# Altium PCB 功耗测试工装.PcbDoc (part 2 of 2)
Units mm, origin at the board's own origin, x right, y up, seen from the top; angles counter-clockwise.
Board outline 154.34 x 149.4 mm, 2 copper layers (Component Side, Bottom Layer), stack 0.325 mm thick; 158 components, 88 nets, 495 pads, 374 vias.
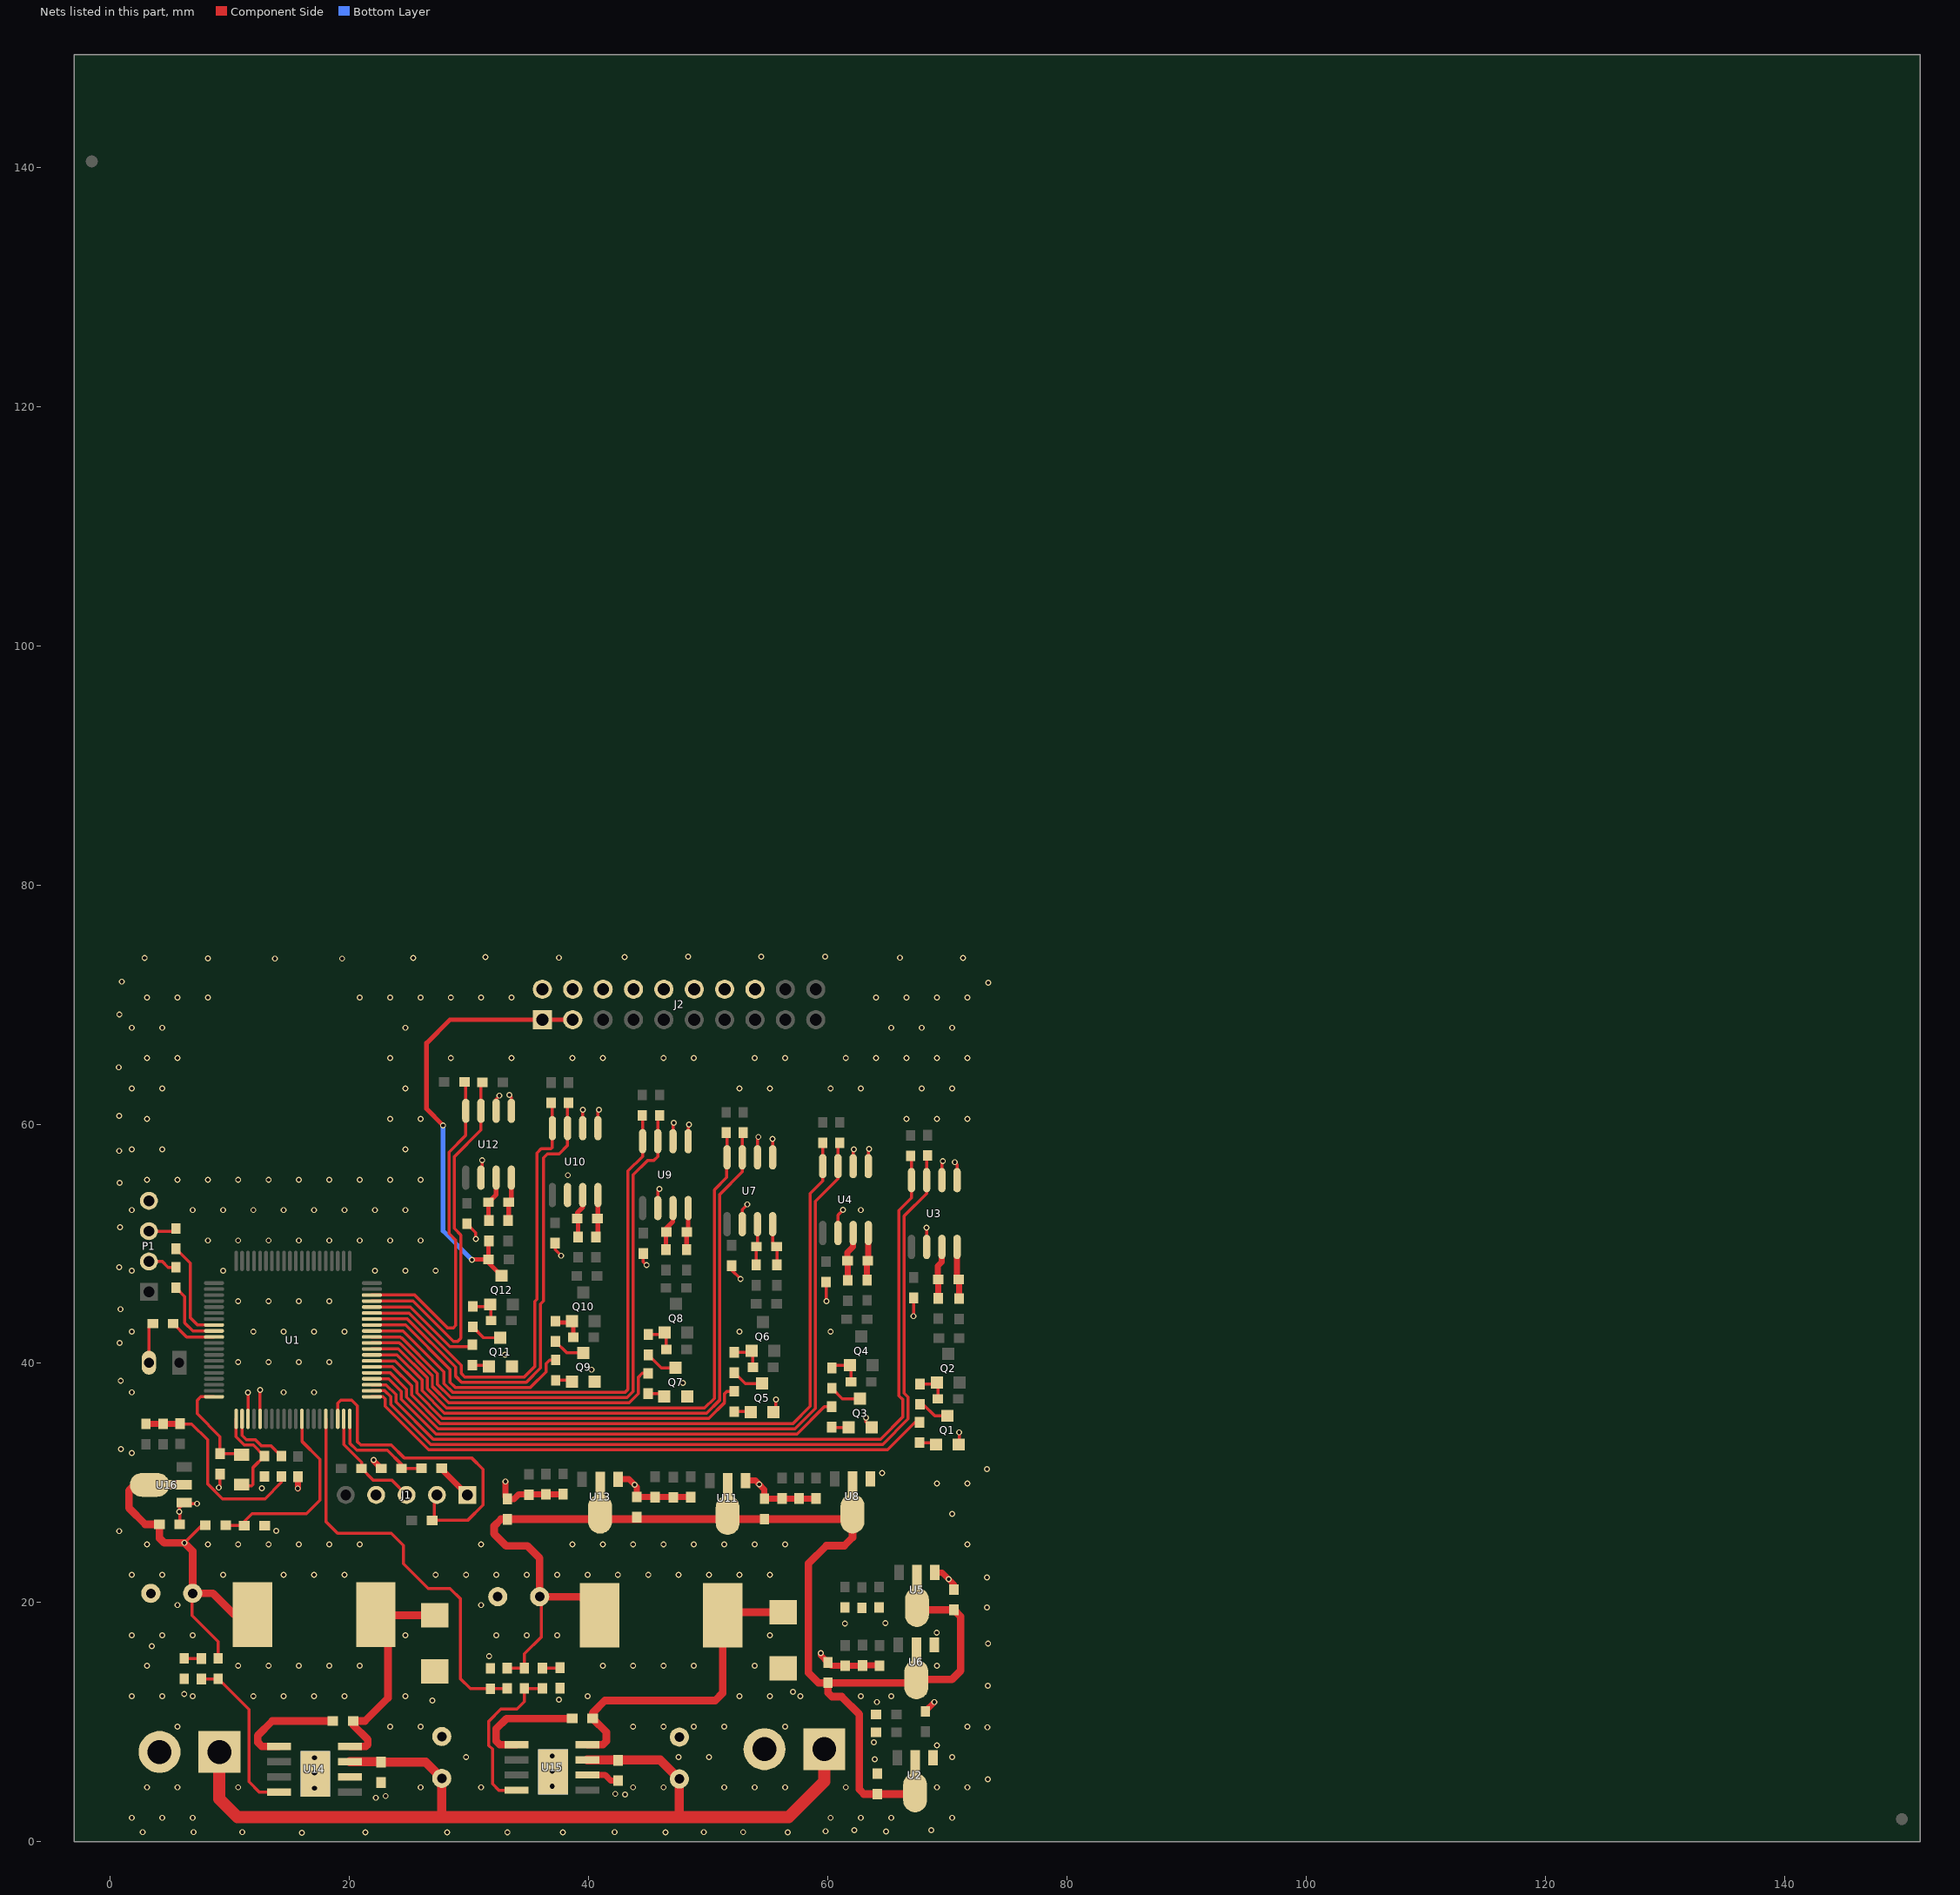
[diagram p2: the nets of this part, all layers, seen from the top]

## Via types
v1: diameter 0.5, hole 0.3, Component Side to Bottom Layer, tented both sides, 368 vias
v2: diameter 0.813, hole 0.406, Component Side to Bottom Layer, 6 vias

## Nets (pads, with @x,y where several pads share a name; then routed paths per layer and width w, separated by ;. In a path a pad name is that pad's centre, name@x,y a point inside that pad or via, vN(x,y) a via of type N, cw(c..) or ccw(c..) an arc to the next point about the centre after c; other vN are vias at no path point) (continued)
3_6V_6_OUT: J2.1 J2.3 Q12.3 R51.1 R52.2 | length 37.5
  Component Side w0.381: v1(27.838,59.893) 26.467,61.265 26.467,66.777 28.423,68.732 J2.1@36.144,68.732 J2.3@38.684,68.732 ; v1(30.251,48.666) 30.277,48.692 R52.2@31.648,48.692 ; R51.1@31.674,50.241 31.648,50.216 R52.2@31.648,48.692 ; Q12.3@32.741,47.326 31.648,48.419 R52.2@31.648,48.692
  Bottom Layer w0.381: v1(27.838,59.893) 27.838,51.079 v1(30.251,48.666)
3_6V_dianliu_CHK_1: R10.2 U1.1 | length 48.9
  Component Side w0.254: U1.1@21.891,37.211 22.835,37.211 23.012,37.033 23.012,36.423 26.644,32.791 64.999,32.791 67.285,35.077 R10.2@67.691,35.077
3_6V_dianliu_CHK_2: R18.2 U1.4 | length 41.7
  Component Side w0.254: U1.4@21.891,38.711 23.291,38.711 24.359,37.643 24.359,36.997 27.269,34.087 57.432,34.087 59.718,36.373 R18.2@60.325,36.373
3_6V_dianliu_CHK_3: R26.2 U1.7 | length 34.2
  Component Side w0.254: U1.7@21.891,40.211 23.84,40.211 25.654,38.397 25.654,37.534 27.78,35.408 50.066,35.408 51.384,36.726 51.384,37.465 51.587,37.668 R26.2@52.197,37.668
3_6V_dianliu_CHK_4: R34.2 U1.10 | length 27.5
  Component Side w0.254: U1.10@21.891,41.711 24.176,41.711 24.228,41.658 24.267,41.658 26.949,38.976 26.949,38.07 28.317,36.703 43.411,36.703 44.171,37.463 44.171,38.837 44.501,39.167 R34.2@44.983,39.167
3_6V_dianliu_CHK_5: R42.2 U1.13 | length 19.5
  Component Side w0.254: U1.13@21.891,43.211 24.709,43.211 28.426,39.494 28.426,38.426 28.853,37.998 35.154,37.998 36.449,39.294 36.449,39.98 36.754,40.284 R42.2@37.262,40.284
3_6V_dianliu_CHK_6: R50.2 U1.16 | length 9.8
  Component Side w0.254: U1.16@21.891,44.711 25.115,44.711 28.423,41.403 30.15,41.403 R50.2@30.302,41.554
5V: C8.1 C14.1 C20.1 C26.1 C32.1 C38.1 C49.1 L2.2 R56.2 R62.2 U2.2 U5.2 U6.2 U8.2 U11.2 U13.2 | length 105.7
  Component Side w0.254: R56.2@33.198,14.529 R62.2@34.646,14.529 34.646,15.723 36.043,17.12 36.043,20.371 C49.1@35.916,20.498
  Component Side w0.635: L2.2@40.926,18.948 39.376,20.498 C49.1@35.916,20.498 35.916,23.724 34.9,24.74 33.122,24.74 32.106,25.756 32.106,26.391 32.69,26.975 61.614,26.975 U8.2@62.078,27.439 62.078,25.451 61.392,24.765 59.893,24.765 58.395,23.266 58.395,14.148 59.245,13.297 C20.1@60.02,13.297 ; U2.2@67.31,4.121 67.189,4.001 C8.1@64.16,4.001 63.03,4.001 62.636,4.394 62.636,10.668 61.163,12.141 60.35,12.141 60.02,12.471 C20.1@60.02,13.297 ; U5.2@67.462,19.615 67.685,19.393 C14.1@70.561,19.393 71.12,18.834 71.12,14.3 70.39,13.57 U6.2@67.412,13.57 67.139,13.297 C20.1@60.02,13.297
ADC_5V: R56.1 R64.2 U1.76 | length 34.4
  Component Side w0.254: U1.76@18.041,35.361 18.041,26.79 19.025,25.806 23.52,25.806 24.536,24.79 24.536,23.241 26.594,21.184 28.423,21.184 29.312,20.295 29.312,13.614 30.124,12.802 R64.2@31.801,12.802 31.826,12.827 R56.1@33.198,12.827
ADC_MCU_5V: R55.1 R63.2 U1.72 | length 16.4
  Component Side w0.254: R55.1@9.677,26.467 11.201,26.467 R63.2@11.227,26.441 11.227,26.772 11.887,27.432 16.434,27.432 17.551,28.55 17.551,31.981 16.041,33.492 U1.72@16.041,35.361
GND: C1.2 C2.1 C3.2 C4.2 C5.1 C6.1 C7.2 C8.2 C9.2 C10.2 C12.1 C13.2 C14.2 C15.2 C16.2 C18.1 C19.2 C20.2 C21.2 C22.2 C24.1 C25.2 C26.2 C27.2 C28.2 C30.1 C31.2 C32.2 C33.2 C34.2 C36.1 C37.2 C38.2 C39.2 C40.2 C44.2 C45.2 C46.2 C47.2 C48.2 C49.2 C50.2 C51.2 C52.2 C53.2 D2.1 D3.1 J1.4 J2.2 J2.4 J2.6 J2.8 J2.10 J2.12 J2.14 J2.16 JP1.2 JP2.2 P1.4 Q1.2 Q3.2 Q5.2 Q7.2 Q9.2 Q11.2 R57.1 R60.1 R63.1 R64.1 U1.63 U1.65 U2.1 U3.1 U3.2 U3.6 U4.1 U4.2 U4.6 U5.1 U6.1 U7.1 U7.2 U7.6 U8.1 U9.1 U9.2 U9.6 U10.1 U10.2 U10.6 U11.1 U12.1 U12.2 U12.6 U13.1 U14.6 U14.9 U15.6 U15.9 U16.1 | length 98.9
  Component Side w0.254: C51.2@5.83,26.543 5.83,27.571 v1(5.791,27.61) 5.791,27.928 U16.1@6.209,28.345 6.283,28.27 v1(7.264,28.27) ; C50.2@5.842,34.938 6.82,34.938 8.153,33.604 8.153,29.924 9.401,28.677 12.954,28.677 14.326,30.048 C1.2@14.326,30.543 ; v1(9.093,29.616) 9.195,29.718 C5.1@9.195,30.747 ; U1.63@11.541,35.361 v1(11.541,37.557) ; U1.65@12.541,35.361 v1(12.541,37.788) v1@12.548,37.795 ; C36.1@29.845,51.677 30.582,50.94 v1(30.582,50.394) ; U12.6@31.013,55.524 31.115,55.626 v1(31.115,56.972) ; U12.2@32.283,61.112 32.283,62.103 v1(32.563,62.382) ; v1(33.376,62.433) 33.553,62.255 U12.1@33.553,61.112 ; C30.1@37.211,50.051 37.211,49.505 v1(37.719,48.997) ; U10.2@39.522,59.665 v1(39.522,61.189) ; U10.1@40.792,59.665 40.792,61.112 v1(40.869,61.189) ; C24.1@44.577,49.187 44.577,48.489 v1(44.856,48.209) ; U9.6@45.796,52.984 45.796,54.458 v1(45.923,54.585) ; U9.2@47.066,58.572 47.066,60.02 v1(47.142,60.096) ; U9.1@48.336,58.572 48.336,59.893 v1(48.412,59.969) ; C18.1@51.968,48.171 51.968,47.803 v1(52.712,47.059) ; U7.6@52.857,51.638 52.857,52.858 v1(53.29,53.291) ; U7.2@54.127,57.226 54.127,58.852 v1(54.204,58.928) ; U7.1@55.397,57.226 v1(55.397,58.776) ; Q5.2@55.458,35.909 55.677,36.128 v1(55.677,36.982) ; C12.1@59.868,46.8 59.868,45.237 v1(59.893,45.212) ; U4.6@60.858,50.902 60.858,52.4 v1(61.29,52.832) ; U4.2@62.128,56.49 62.128,57.836 v1(62.179,57.887) ; v1(63.195,35.458) 63.195,35.107 Q3.2@63.663,34.639 ; U4.1@63.398,56.49 63.398,57.861 v1(63.475,57.937) ; v1(67.183,43.942) C6.1@67.183,45.479 ; v1(68.25,51.359) 68.275,51.333 U3.6@68.275,49.733 ; U3.2@69.545,55.321 69.545,56.82 v1(69.621,56.896) ; v1(70.612,56.82) 70.815,56.617 U3.1@70.815,55.321 ; Q1.2@70.952,33.217 70.993,33.258 v1(70.993,34.239)
  Component Side w0.508: C53.2@2.997,34.938 C52.2@4.445,34.938 C50.2@5.842,34.938 ; v1(15.697,29.54) 15.723,29.566 C2.1@15.723,30.518 ; v1(22.047,31.928) 22.047,31.839 C3.2@22.669,31.217 ; v1(33.045,30.124) 33.045,28.842 C38.2@33.223,28.664 33.77,28.664 34.175,29.07 C40.2@37.871,29.07 ; U15.6@39.925,5.588 41.402,5.588 41.872,5.118 C47.2@42.469,5.118 ; U13.1@42.47,30.313 43.398,30.313 v1(43.866,29.845) 44.044,29.667 C32.2@44.044,28.842 48.514,28.842 C34.2@48.539,28.816 ; U11.1@53.138,30.212 53.964,30.212 v1(54.28,29.896) 54.712,29.464 C26.2@54.712,28.69 59.005,28.69 C25.2@59.03,28.714 ; v1(59.436,15.773) 59.436,15.583 C20.2@60.02,14.999 60.3,14.719 C19.2@61.468,14.719 62.89,14.719 C21.2@62.916,14.744 64.364,14.744 C22.2@64.338,14.719 ; C10.2@68.174,10.91 68.174,10.947 v1(68.91,11.684) ; U5.1@68.962,22.515 69.585,22.515 v1(70.129,21.971) 70.561,21.539 C14.2@70.561,21.095
  other v1: 16.027,0.762 21.336,0.787 28.194,0.787 33.223,0.787 37.846,0.787 46.431,0.787 56.667,0.787 2.718,0.813 6.985,0.813 11.049,0.813 42.189,0.813 49.632,0.813 52.934,0.813 64.872,0.864 59.817,0.889 62.23,0.965 68.656,0.965 1.824,2.017 4.364,2.017 6.904,2.017 60.244,2.017 62.784,2.017 65.324,2.017 70.404,2.017 22.225,3.683 23.038,3.835 43.053,3.962 42.24,4.013 3.094,4.557 5.634,4.557 10.714,4.557 25.954,4.557 31.034,4.557 43.734,4.557 46.274,4.557 51.354,4.557 53.894,4.557 56.434,4.557 61.514,4.557 69.134,4.557 71.674,4.557 73.381,5.232 63.932,6.909 29.764,7.097 47.544,7.097 50.084,7.097 70.404,7.097 69.139,8.077 63.856,8.331 73.355,9.576 5.634,9.637 23.414,9.637 25.954,9.637 43.734,9.637 46.274,9.637 48.814,9.637 51.354,9.637 56.434,9.637 71.674,9.637 64.11,11.684 26.949,11.811 37.541,11.887 1.824,12.177 4.364,12.177 6.904,12.177 11.984,12.177 14.524,12.177 17.064,12.177 19.604,12.177 24.684,12.177 39.924,12.177 52.624,12.177 55.164,12.177 57.704,12.177 62.784,12.177 65.324,12.177 6.198,12.37 57.099,12.548 73.381,13.056 3.094,14.717 10.714,14.717 13.254,14.717 15.794,14.717 18.334,14.717 20.874,14.717 41.194,14.717 43.734,14.717 46.274,14.717 48.814,14.717 53.894,14.717 69.134,14.717 31.699,15.519 3.48,16.358 73.406,16.586 1.824,17.257 4.364,17.257 6.904,17.257 24.684,17.257 32.304,17.257 34.844,17.257 37.384,17.257 55.164,17.257 69.113,17.501 61.443,18.263 64.821,18.288 73.304,19.609 5.634,19.797 31.034,19.797 73.33,22.098 1.824,22.337 4.364,22.337 9.444,22.337 14.524,22.337 17.064,22.337 19.604,22.337 27.224,22.337 29.764,22.337 32.304,22.337 34.844,22.337 37.384,22.337 39.924,22.337 42.464,22.337 45.004,22.337 47.544,22.337 50.084,22.337 52.624,22.337 55.164,22.337 3.094,24.877 8.174,24.877 10.714,24.877 13.254,24.877 15.794,24.877 18.334,24.877 20.874,24.877 31.034,24.877 38.654,24.877 41.194,24.877 43.734,24.877 46.274,24.877 48.814,24.877 51.354,24.877 53.894,24.877 56.434,24.877 71.674,24.877 0.762,25.984 13.894,26.01 70.404,27.417 12.7,29.566 69.134,29.957 71.674,29.957 64.541,30.836 73.304,31.166 1.824,32.497 0.914,32.842 1.824,37.577 14.524,37.577 17.064,37.577 47.904,38.354 0.889,38.557 40.259,39.472 10.714,40.117 13.254,40.117 15.794,40.117 18.334,40.117 33.02,40.716 0.813,41.707 1.824,42.657 11.984,42.657 14.524,42.657 17.064,42.657 19.604,42.657 52.624,42.657 60.244,42.657 0.864,44.526 10.714,45.197 13.254,45.197 15.794,45.197 18.334,45.197 1.824,47.737 9.444,47.737 22.144,47.737 24.684,47.737 27.224,47.737 0.762,48.031 8.174,50.277 10.714,50.277 13.254,50.277 15.794,50.277 18.334,50.277 20.874,50.277 23.414,50.277 25.954,50.277 0.838,51.384 1.824,52.817 6.904,52.817 9.444,52.817 11.984,52.817 14.524,52.817 17.064,52.817 19.604,52.817 22.144,52.817 24.684,52.817 62.784,52.817 0.813,55.093 3.094,55.357 5.634,55.357 8.174,55.357 10.714,55.357 13.254,55.357 15.794,55.357 18.334,55.357 20.874,55.357 23.414,55.357 25.954,55.357 38.278,55.728 0.762,57.76 1.824,57.897 4.364,57.897 24.684,57.897 3.094,60.437 23.414,60.437 25.954,60.437 66.594,60.437 69.134,60.437 71.674,60.437 0.762,60.681 1.824,62.977 4.364,62.977 24.684,62.977 52.624,62.977 55.164,62.977 60.244,62.977 62.784,62.977 67.864,62.977 70.404,62.977 0.737,64.745 3.094,65.517 5.634,65.517 23.414,65.517 28.494,65.517 33.574,65.517 38.654,65.517 41.194,65.517 46.274,65.517 48.814,65.517 53.894,65.517 56.434,65.517 61.514,65.517 64.054,65.517 66.594,65.517 69.134,65.517 71.674,65.517 1.824,68.057 4.364,68.057 24.684,68.057 65.324,68.057 67.864,68.057 70.404,68.057 0.787,69.164 3.094,70.597 5.634,70.597 8.174,70.597 20.874,70.597 23.414,70.597 25.954,70.597 28.494,70.597 31.034,70.597 33.574,70.597 64.054,70.597 66.594,70.597 69.134,70.597 71.674,70.597 73.431,71.831 0.991,71.907 13.792,73.838 19.406,73.838 8.179,73.863 2.896,73.889 25.349,73.889 71.323,73.889 37.541,73.914 66.04,73.914 31.394,73.965 43.028,73.965 48.336,73.99 54.432,73.99 59.792,73.99
  other v2: 17.097,4.496 36.96,4.648 17.097,5.766 36.96,5.918 17.097,7.036 36.96,7.188
INA1_SCL: R7.2 U1.3 U3.4 | length 69.8
  Component Side w0.254: U1.3@21.891,38.211 23.08,38.211 23.901,37.39 23.901,36.779 27.026,33.655 64.414,33.655 66.294,35.535 66.294,36.957 65.964,37.287 65.964,52.781 67.005,53.823 U3.4@67.005,55.321 67.005,57.277 R7.2@66.929,57.353
INA1_SDA: R8.2 U1.2 U3.3 | length 70.9
  Component Side w0.254: U1.2@21.891,37.711 22.97,37.711 23.47,37.211 23.47,36.576 26.822,33.223 64.593,33.223 66.726,35.356 66.726,37.186 66.396,37.516 66.396,52.324 68.275,54.204 U3.3@68.275,55.321 68.275,57.302 R8.2@68.351,57.379
INA2_SCL: R15.2 U1.6 U4.4 | length 62.1
  Component Side w0.254: U1.6@21.891,39.711 23.633,39.711 25.222,38.121 25.222,37.355 27.601,34.976 57.099,34.976 58.547,36.424 58.547,54.204 59.588,55.245 U4.4@59.588,56.49 R15.2@59.588,58.445
INA2_SDA: R16.2 U1.5 U4.3 | length 63.2
  Component Side w0.254: U1.5@21.891,39.211 23.426,39.211 24.79,37.846 24.79,37.176 27.448,34.519 57.253,34.519 58.979,36.245 58.979,53.543 60.858,55.423 U4.3@60.858,56.49 60.858,58.293 R16.2@61.011,58.445
INA3_SCL: R23.2 U1.9 U7.4 | length 54.5
  Component Side w0.254: U1.9@21.891,41.211 24.104,41.211 26.518,38.797 26.518,37.892 28.138,36.271 49.708,36.271 50.521,37.084 50.521,54.508 51.562,55.55 U7.4@51.562,57.556 ; R23.2@51.511,59.284 51.587,59.207 U7.4@51.587,57.226
INA3_SDA: R24.2 U1.8 U7.3 | length 55.3
  Component Side w0.254: U1.8@21.891,40.711 23.993,40.711 26.086,38.618 26.086,37.713 27.959,35.839 49.887,35.839 50.952,36.905 50.952,54.102 52.857,56.007 U7.3@52.857,57.226 52.857,59.207 R24.2@52.934,59.284
INA4_SCL: R31.2 U1.12 U9.4 | length 47.6
  Component Side w0.254: U1.12@21.891,42.711 24.498,42.711 27.924,39.285 27.924,38.317 28.674,37.567 43.053,37.567 43.307,37.821 43.307,56.083 44.526,57.302 U9.4@44.526,58.572 44.526,60.706 R31.2@44.501,60.731
INA4_SDA: R32.2 U1.11 U9.3 | length 49
  Component Side w0.254: U1.11@21.891,42.211 24.286,42.211 24.355,42.143 24.393,42.143 27.381,39.155 27.381,39.116 27.381,38.249 28.496,37.135 43.232,37.135 43.739,37.642 43.739,55.753 44.933,56.947 45.441,56.947 45.796,57.302 U9.3@45.796,58.572 45.796,60.579 R32.2@45.949,60.731
INA5_SCL: R39.2 U1.15 U10.4 | length 39.8
  Component Side w0.254: U1.15@21.891,44.211 25.004,44.211 29.366,39.849 29.366,39.163 29.667,38.862 34.625,38.862 35.505,39.742 35.505,45.183 35.687,45.364 35.687,57.582 36.043,57.937 36.855,57.937 36.982,58.064 U10.4@36.982,59.665 36.982,61.671 R39.2@36.881,61.773
INA5_SDA: R40.2 U1.14 U10.3 | length 40.9
  Component Side w0.254: U1.14@21.891,43.711 24.869,43.711 28.902,39.678 ; 28.91,39.67 28.91,38.908 29.388,38.43 34.804,38.43 35.992,39.618 35.992,44.958 36.246,45.212 36.246,57.175 36.576,57.506 37.541,57.506 38.252,58.217 U10.3@38.252,59.665 38.252,61.697 R40.2@38.329,61.773
INA6_SCL: R47.2 U1.18 U12.4 | length 29.4
  Component Side w0.254: U1.18@21.891,45.711 25.485,45.711 28.219,42.977 28.702,42.977 28.905,43.18 28.905,50.292 28.346,50.851 28.346,57.658 29.743,59.055 U12.4@29.743,61.112 29.743,63.424 R47.2@29.642,63.525
INA6_SDA: R48.2 U1.17 U12.3 | length 31.6
  Component Side w0.254: U1.17@21.891,45.211 25.325,45.211 28.701,41.834 29.059,41.834 29.337,42.112 29.337,50.724 28.778,51.283 28.778,57.277 31.013,59.512 U12.3@31.013,61.112 31.013,63.373 R48.2@31.14,63.5
LED: R5.1 U1.50 | length 3.9
  Component Side w0.254: R5.1@5.283,43.332 6.405,42.211 U1.50@8.691,42.211
NetC1_1: C1.1 U1.62 | length 5.4
  Component Side w0.254: U1.62@11.041,35.361 11.041,33.968 11.402,33.607 12.152,33.607 12.637,33.122 13.449,33.122 C1.1@14.326,32.245
NetC11_1: C11.1 R11.2 U3.7 | length 4.5
  Component Side w0.508: R11.2@69.24,45.441 69.253,45.454 C11.1@69.253,47.015 69.215,47.054 69.215,48.133 69.545,48.463 U3.7@69.545,49.733
NetC11_2: C11.2 R14.2 U3.8 | length 4.4
  Component Side w0.508: U3.8@70.815,49.733 70.815,47.155 C11.2@70.955,47.015 70.993,46.978 R14.2@70.993,45.415
NetC17_1: C17.1 R19.2 U4.7 | length 4.2
  Component Side w0.508: R19.2@61.671,46.939 61.671,48.578 C17.1@61.659,48.59 61.646,48.603 61.646,49.276 62.128,49.759 U4.7@62.128,50.902
NetC17_2: C17.2 R22.2 U4.8 | length 4
  Component Side w0.508: R22.2@63.297,46.965 63.297,48.526 C17.2@63.361,48.59 63.398,48.628 U4.8@63.398,50.902
NetC23_1: C23.1 R27.2 U7.7 | length 3.4
  Component Side w0.254: R27.2@54.026,48.235 54.026,49.746 C23.1@54.039,49.759 54.127,49.847 U7.7@54.127,51.638
NetC23_2: C23.2 R30.2 U7.8 | length 3.9
  Component Side w0.254: U7.8@55.423,51.968 55.423,50.076 C23.2@55.741,49.759 55.753,49.746 R30.2@55.753,48.235
NetC29_1: C29.1 R35.2 U9.7 | length 3.7
  Component Side w0.381: R35.2@46.482,49.505 46.482,50.939 C29.1@46.52,50.978 46.52,51.321 47.066,51.867 U9.7@47.066,52.984
NetC29_2: C29.2 R38.2 U9.8 | length 3.5
  Component Side w0.381: R38.2@48.209,49.505 48.209,50.965 C29.2@48.222,50.978 48.336,51.092 U9.8@48.336,52.984
NetC35_1: C35.1 R43.2 U10.7 | length 3.7
  Component Side w0.381: R43.2@39.141,50.571 39.141,52.032 C35.1@39.053,52.121 39.053,52.591 39.522,53.061 U10.7@39.522,54.077
NetC35_2: C35.2 R46.2 U10.8 | length 3.6
  Component Side w0.381: R46.2@40.615,50.571 40.792,50.749 U10.8@40.792,54.077
NetC41_1: C41.1 R51.2 U12.7 | length 3.9
  Component Side w0.381: R51.2@31.674,51.943 31.636,51.981 C41.1@31.636,53.467 32.283,54.114 U12.7@32.283,55.524
NetC41_2: C41.2 R54.2 U12.8 | length 3.7
  Component Side w0.381: R54.2@33.274,51.943 33.338,52.007 C41.2@33.338,53.467 33.553,53.683 U12.8@33.553,55.524
NetC42_1: C42.1 D2.2 L1.1 U14.8 | length 20
  Component Side w0.635: U14.8@20.062,7.976 21.387,7.976 21.541,8.13 21.541,8.558 20.332,9.767 C42.1@20.332,10.109 21.311,10.109 23.241,12.04 23.241,17.977 L1.1@22.282,18.936 ; L1.1@22.219,18.999 L1.1@22.282,18.936 ; D2.2@27.153,18.936 L1.1@22.282,18.936
NetC42_2: C42.2 U14.1 | length 9.3
  Component Side w0.635: U14.1@14.122,7.976 12.7,7.976 12.344,8.331 12.344,8.89 13.564,10.109 C42.2@18.631,10.109
NetC43_1: C43.1 D3.2 L2.1 U15.8 | length 27.8
  Component Side w0.635: U15.8@39.925,8.128 41.199,8.128 41.504,8.433 41.504,9.156 C43.1@40.348,10.312 40.348,10.782 41.377,11.811 50.597,11.811 51.226,12.44 L2.1@51.226,18.948 51.467,19.19 D3.2@56.286,19.19
NetC43_2: C43.2 U15.1 | length 9.6
  Component Side w0.635: U15.1@33.985,8.128 32.588,8.128 32.283,8.433 32.283,9.449 33.147,10.312 C43.2@38.646,10.312
NetD1_2: D1.2 R5.2 | length 3.4
  Component Side w0.254: D1.2@3.251,40.056 3.251,43.002 R5.2@3.581,43.332
NetJ1_1: J1.1 R3.2 | length 3.1
  Component Side w0.508: R3.2@27.737,31.242 27.737,31.14 J1.1@29.87,29.007
NetP1_2: P1.2 R1.2 | length 2.5
  Component Side w0.254: P1.2@3.251,48.514 4.369,48.514 4.851,48.031 R1.2@5.512,48.031
NetP1_3: P1.3 R2.2 | length 2.4
  Component Side w0.254: P1.3@3.251,51.054 5.283,51.054 R2.2@5.512,51.283
NetQ1_1: Q1.1 R10.1 | length 1.4
  Component Side w0.254: R10.1@67.691,33.376 68.894,33.376 Q1.1@69.052,33.217
NetQ1_3: Q1.3 R9.2 | length 2.7
  Component Side w0.254: R9.2@67.716,36.576 67.996,36.576 68.955,35.617 Q1.3@70.002,35.617
NetQ2_1: Q2.1 R9.1 R13.1 | length 2.9
  Component Side w0.254: R9.1@67.716,38.278 69.008,38.278 Q2.1@69.129,38.399 69.215,38.312 R13.1@69.215,37.033
NetQ3_1: Q3.1 R18.1 | length 1.5
  Component Side w0.254: R18.1@60.325,34.671 60.357,34.639 Q3.1@61.763,34.639
NetQ3_3: Q3.3 R17.2 | length 2.7
  Component Side w0.254: R17.2@60.35,37.922 61.233,37.039 Q3.3@62.713,37.039
NetQ4_1: Q4.1 R17.1 R21.1 | length 3
  Component Side w0.254: R17.1@60.35,39.624 60.573,39.846 Q4.1@61.864,39.846 61.951,39.76 R21.1@61.951,38.456
NetQ5_1: Q5.1 R26.1 | length 1.4
  Component Side w0.254: R26.1@52.197,35.966 53.501,35.966 Q5.1@53.558,35.909
NetQ5_3: Q5.3 R25.2 | length 2.7
  Component Side w0.254: R25.2@52.197,39.218 53.105,38.309 Q5.3@54.508,38.309
NetQ6_1: Q6.1 R25.1 R29.1 | length 2.9
  Component Side w0.254: R25.1@52.197,40.919 53.514,40.919 Q6.1@53.635,41.04 53.746,40.928 R29.1@53.746,39.675
NetQ7_1: Q7.1 R34.1 | length 1.5
  Component Side w0.254: R34.1@44.983,37.465 46.11,37.465 Q7.1@46.345,37.23
NetQ7_3: Q7.3 R33.2 | length 2.7
  Component Side w0.254: R33.2@45.009,40.716 46.095,39.63 Q7.3@47.295,39.63
NetQ8_1: Q8.1 R33.1 R37.1 | length 2.9
  Component Side w0.254: R33.1@45.009,42.418 46.224,42.418 Q8.1@46.37,42.564 46.507,42.427 R37.1@46.507,41.173
NetQ9_1: Q9.1 R42.1 | length 1.4
  Component Side w0.254: R42.1@37.262,38.583 38.515,38.583 Q9.1@38.623,38.475
NetQ9_3: Q9.3 R41.2 | length 2.7
  Component Side w0.254: R41.2@37.236,41.834 38.195,40.875 Q9.3@39.573,40.875
NetQ10_1: Q10.1 R41.1 R45.1 | length 2.8
  Component Side w0.381: R41.1@37.236,43.536 37.354,43.418 38.735,43.418 R45.1@38.735,42.189
NetQ11_1: Q11.1 R50.1 | length 1.4
  Component Side w0.254: R50.1@30.302,39.853 31.581,39.853 Q11.1@31.689,39.745
NetQ11_3: Q11.3 R49.2 | length 2.7
  Component Side w0.254: R49.2@30.328,43.053 31.236,42.145 Q11.3@32.639,42.145
NetQ12_1: Q12.1 R49.1 R53.1 | length 2.9
  Component Side w0.254: R49.1@30.328,44.755 31.619,44.755 Q12.1@31.791,44.926 31.852,44.865 R53.1@31.852,43.586
NetR57_2: R57.2 R58.1 | length 1.5
  Component Side w0.254: R57.2@6.198,15.342 7.62,15.342 R58.1@7.645,15.316
NetR58_2: R58.2 R59.1 U14.4 | length 14.2
  Component Side w0.254: R58.2@7.645,13.614 9.017,13.614 R59.1@9.042,13.64 ; R59.1@9.042,13.919 R59.1@9.042,13.64 ; U14.4@14.122,4.166 12.471,4.166 11.608,5.029 11.608,11.074 R59.1@9.042,13.64
NetR60_2: R60.2 R61.1 | length 1.5
  Component Side w0.254: R61.1@36.144,14.529 37.592,14.529 R60.2@37.617,14.554
NetR61_2: R61.2 R62.1 U15.4 | length 13.8
  Component Side w0.254: U15.4@33.985,4.318 32.512,4.318 31.979,4.851 31.979,7.747 31.661,8.064 31.661,10.071 32.69,11.1 34.011,11.1 34.646,11.735 R62.1@34.646,12.827 R61.2@36.144,12.827
RST: C3.1 R3.1 U1.80 | length 9.1
  Component Side w0.254: U1.80@20.041,35.361 20.041,33.326 20.63,32.737 23.194,32.737 24.371,31.56 C3.1@24.371,31.217 26.01,31.217 R3.1@26.035,31.242
SW_UART_RXD: R2.1 U1.48 | length 8.5
  Component Side w0.254: R2.1@5.512,49.581 6.706,48.387 6.706,43.815 7.31,43.211 U1.48@8.691,43.211
SW_UART_TXD: R1.1 U1.49 | length 6
  Component Side w0.254: R1.1@5.512,46.33 6.248,45.593 6.248,43.383 6.921,42.711 U1.49@8.691,42.711
SWCLK: J1.2 R4.2 U1.78 | length 27.8
  Component Side w0.254: U1.78@19.041,35.361 19.041,36.668 19.304,36.932 20.193,36.932 20.676,36.449 20.676,33.452 20.959,33.168 23.524,33.168 24.587,32.106 30.226,32.106 31.191,31.14 31.191,28.169 29.896,26.873 R4.2@26.924,26.873 27.102,27.051 27.102,28.778 J1.2@27.33,29.007
SWIO: J1.3 R6.2 U1.79 | length 9.4
  Component Side w0.254: U1.79@19.541,35.361 19.541,33.215 21.031,31.725 R6.2@21.031,31.217 21.996,30.251 23.546,30.251 J1.3@24.79,29.007
VIN_5V: C48.1 C51.1 L1.2 R55.2 R59.2 U16.2 | length 28.9
  Component Side w0.254: v1(6.223,24.994) 7.696,26.467 R55.2@7.976,26.467 ; C48.1@6.909,20.777 6.858,20.726 6.858,18.923 9.042,16.739 R59.2@9.042,15.342
  Component Side w0.635: U16.2@3.309,29.845 2.057,29.845 1.575,29.362 1.575,27.915 2.946,26.543 C51.1@4.128,26.543 4.128,25.387 4.521,24.994 v1(6.223,24.994) 6.909,24.308 C48.1@6.909,20.777 8.611,20.777 10.389,18.999 L1.2@11.919,18.999
VIN_12V: C44.1 C45.1 C46.1 C47.1 JP1.1 JP2.1 U14.7 U15.7 | length 82
  Component Side w0.762: U14.7@20.062,6.706 22.618,6.706 C46.1@22.657,6.667 26.378,6.667 C44.1@27.737,5.309 27.737,2.108 27.711,2.083 ; U15.7@39.925,6.858 45.999,6.858 C45.1@47.6,5.258 47.6,2.083
  Component Side w1.016: JP1.1@9.144,7.518 9.144,3.607 10.668,2.083 27.711,2.083 47.6,2.083 56.744,2.083 59.715,5.055 JP2.1@59.715,7.747
XT1: C4.1 U1.61 Y1.1 | length 8.3
  Component Side w0.254: U1.61@10.541,35.361 10.541,33.857 11.223,33.175 11.973,33.175 C4.1@12.903,32.245 11.963,31.305 11.963,29.901 11.831,29.769 11.1,29.769 Y1.1@10.998,29.87
XT2: C5.2 U1.60 Y1.2 | length 8.6
  Component Side w0.254: U1.60@8.691,37.211 7.594,37.211 7.29,36.906 7.29,35.789 9.195,33.884 C5.2@9.195,32.449 10.92,32.449 Y1.2@10.998,32.37
pads on no net: MARK1.0 MARK1.1 MARK2.0 MARK2.1 P1.1 U1.19 U1.20 U1.21 U1.22 U1.23 U1.24 U1.25 U1.26 U1.27 U1.28 U1.29 U1.30 U1.31 U1.32 U1.33 U1.34 U1.35 U1.36 U1.37 U1.38 U1.39 U1.40 U1.41 U1.42 U1.43 U1.44 U1.45 U1.46 U1.47 U1.51 U1.52 U1.53 U1.54 U1.55 U1.56 U1.57 U1.58 U1.59 U1.67 U1.68 U1.69 U1.70 U1.71 U1.73 U1.74 U1.75 U1.77 U14.2 U14.3 U14.5 U15.2 U15.3 U15.5

## Polygon pours and split planes (outlines as drawn)
GND on Bottom Layer "Component Side-No Net" (solid, pour order 0): 0,1.803 1.803,0 69.926,0 74.168,4.242 74.168,72.136 71.603,74.701 2.515,74.701 0,72.187
GND on Component Side "Component Side-No Net" (solid, pour order 2): 0,1.803 1.803,0 69.926,0 74.168,4.242 74.168,72.136 71.603,74.701 2.515,74.701 0,72.187

## Keep-outs
Keep-Out Layer:
  lines w0.025: 0,0 1.803,0 ; 0,0 0,1.803 ; 0,0 -3,0 -3,149.403 0,149.403 ; 0,1.803 0,72.187 ; 0,1.803 1.803,0 ; 0,72.187 2.515,74.701 ; 0,72.187 0,74.701 ; 0,74.701 2.515,74.701 ; 0,74.701 0,76.505 ; 0,74.701 1.803,74.701 ; 0,76.505 1.803,74.701 ; 0,76.505 0,146.888 ; 0,146.888 0,149.403 ; 0,146.888 2.515,149.403 ; 0,149.403 2.515,149.403 ; 1.803,0 69.926,0 ; 1.803,74.701 69.926,74.701 ; 2.515,74.701 71.603,74.701 ; 2.515,149.403 71.603,149.403 ; 69.926,0 74.168,4.242 ; 69.926,0 73.025,0 74.168,0 ; 69.926,74.701 73.025,74.701 74.168,74.701 ; 69.926,74.701 74.168,78.943 ; 71.603,74.701 74.168,72.136 ; 71.603,74.701 74.168,74.701 ; 71.603,149.403 74.168,149.403 ; 71.603,149.403 74.168,146.837 ; 74.168,0 74.168,4.242 ; 74.168,0 74.168,1.803 ; 74.168,0 75.971,0 ; 74.168,1.803 75.971,0 ; 74.168,1.803 74.168,72.187 ; 74.168,4.242 74.168,31.979 74.168,72.136 ; 74.168,72.136 74.168,74.701 ; 74.168,72.187 74.168,74.701 ; 74.168,72.187 76.683,74.701 ; 74.168,74.701 76.683,74.701 ; 74.168,74.701 74.168,78.943 ; 74.168,74.701 74.168,76.505 ; 74.168,74.701 75.971,74.701 ; 74.168,76.505 75.971,74.701 ; 74.168,76.505 74.168,146.888 ; 74.168,78.943 74.168,106.68 74.168,146.837 ; 74.168,146.837 74.168,149.403 ; 74.168,146.888 74.168,149.403 ; 74.168,146.888 76.683,149.403 ; 74.168,149.403 76.683,149.403 ; 75.971,0 144.094,0 ; 75.971,74.701 144.094,74.701 ; 76.683,74.701 145.771,74.701 ; 76.683,149.403 145.771,149.403 ; 144.094,0 147.193,0 148.336,0 ; 144.094,0 148.336,4.242 ; 144.094,74.701 147.193,74.701 148.336,74.701 ; 144.094,74.701 148.336,78.943 ; 145.771,74.701 148.336,74.701 ; 145.771,74.701 148.336,72.136 ; 145.771,149.403 148.336,149.403 ; 145.771,149.403 148.336,146.837 ; 148.336,0 148.336,4.242 ; 148.336,0 151.336,0 151.336,149.403 148.336,149.403 ; 148.336,4.242 148.336,31.979 148.336,72.136 ; 148.336,72.136 148.336,74.701 ; 148.336,74.701 148.336,78.943 ; 148.336,78.943 148.336,106.68 148.336,146.837 ; 148.336,146.837 148.336,149.403

## Other copper
Component Side:
  pour cut-out: 13.905,22.065 20.214,22.065 20.214,15.773 13.905,15.773
  pour cut-out: 42.901,22.044 49.209,22.044 49.209,15.752 42.901,15.752
Bottom Layer:
  pour cut-out: 13.88,22.091 20.189,22.091 20.189,15.799 13.88,15.799
  pour cut-out: 42.901,22.044 49.209,22.044 49.209,15.752 42.901,15.752

## Silkscreen, mask and mechanical layers (free items; w line width, h text height)
Top Overlay:
  drawing of 6 lines, arcs and shapes, not listed
  text "V1" at 20.574,53.289 h1.52
  text "功耗检测" at 8.509,53.01 h3.05
  text "WX0.010.618PCB" at 8.611,51.714 h1.52
  text "2024-11-11" at 8.712,50.648 h0.76

## Text inside footprints (layer, text, board x,y; h text height)
C44: Top Overlay "+" at 27.237,4.214 h0.76 r270
C45: Top Overlay "+" at 47.1,4.163 h0.76 r270
C48: Top Overlay "+" at 8.004,20.277 h0.76
C49: Top Overlay "+" at 37.01,19.998 h0.76